# EAGLE board 12VConnector (EAGLE 9.5.2)
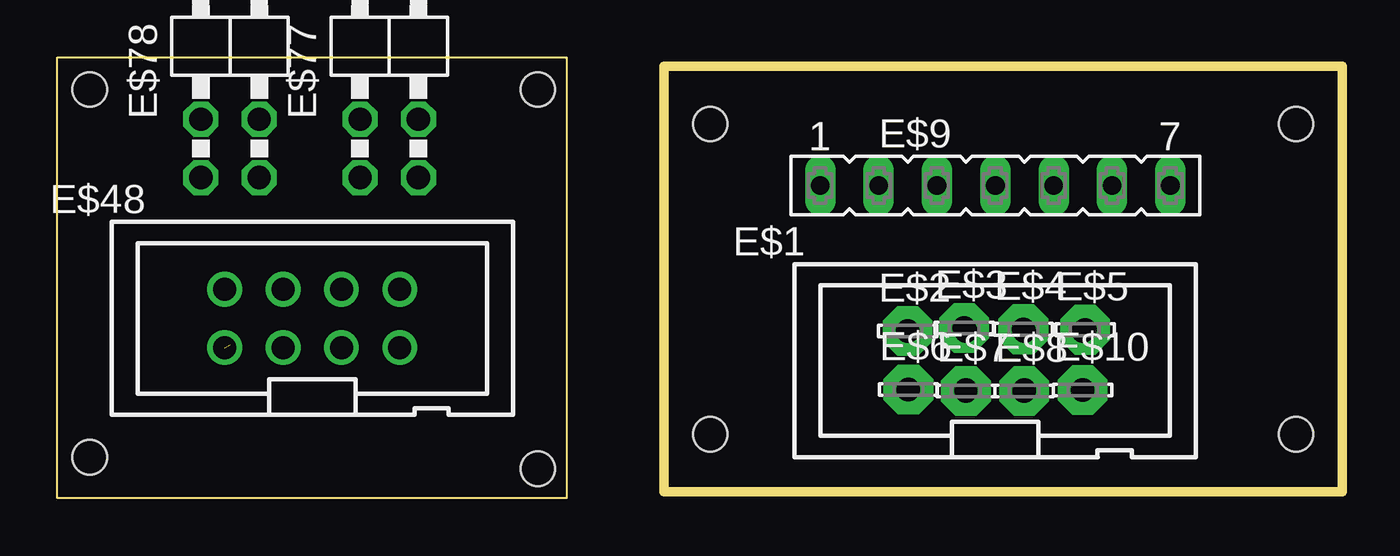
[diagram p0: board, top side]
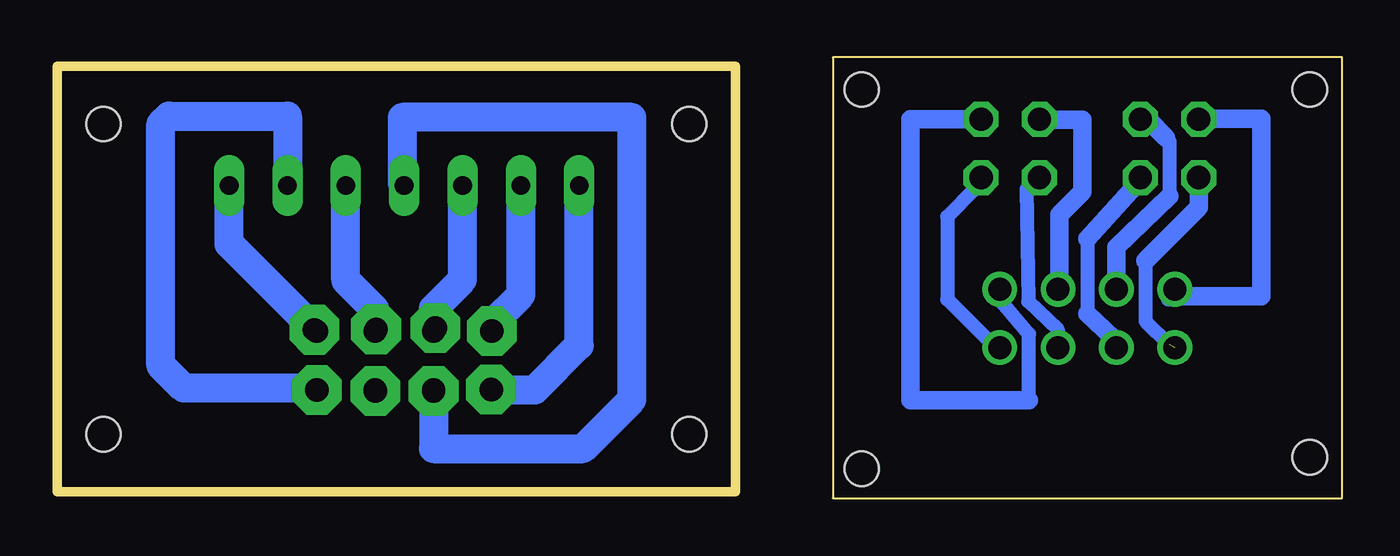
[diagram p1: board, bottom side, seen from below]

Size 55.91 x 19.17 mm. Coordinates in mm from the lower left corner, seen from the top.
Outline: 0,0 0,19.17 22.16,19.17 22.16,0 0,0
Outline: 26.41,0.28 26.41,18.78 55.91,18.78 55.91,0.28 26.41,0.28
Copper layers (1*16): Top 0.035mm / dielectric 1.5mm / Bottom 0.035mm
Design rules "default": minimum track width 10mil, minimum drill 24mil, track to track 8mil, track to pad 8mil, pad to pad 8mil, via to via 8mil, smd to smd 8mil, copper to edge 40mil, drill to drill 8mil, minimum pad ring 10mil, minimum via ring 8mil, stop-mask expansion 4mil, vias tented up to drill 0mil, thermal gap 10mil
Holes 1.5 mm at 1.41,17.78 20.91,17.78 20.91,1.28 1.41,1.78 28.41,16.28 53.91,16.28 53.91,2.78 28.41,2.78

## Footprints (pad centres in the part's own frame; a part is rotated, then mirrored left to right if it is on the bottom)
PAK100/2500-8 = drill 1 pad 1.422: 3 -2.54,-1.27; 4 -2.54,1.27; 5 0,-1.27; 6 0,1.27; 7 2.54,-1.27; 8 2.54,1.27; 9 5.08,-1.27; 10 5.08,1.27
LSP10 = drill 1.016 pad 2.159 octagon: MP 0,0
FE07 = drill 0.813 long: 1 -7.62,0; 2 -5.08,0; 3 -2.54,0; 4 0,0; 5 2.54,0; 6 5.08,0; 7 7.62,0
2X02/90 = drill 1.016 octagon: 1 -1.27,-6.35; 2 -1.27,-3.81; 3 1.27,-6.35; 4 1.27,-3.81

## Placement (x,y rotation side)
E$1  [PAK100/2500-8]  39.55,5.98 0 top
E$2  [LSP10]  36.99,7.27 0 top
E$3  [LSP10]  39.46,7.41 0 top
E$4  [LSP10]  42.04,7.35 0 top
E$5  [LSP10]  44.72,7.33 0 top
E$6  [LSP10]  37.03,4.72 0 top
E$7  [LSP10]  39.54,4.66 0 top
E$8  [LSP10]  42.07,4.65 0 top
E$9  [FE07]  40.81,13.6 0 top
E$10  [LSP10]  44.62,4.7 0 top
E$48  [PAK100/2500-8]  9.82,7.82 0 top
E$77  [2X02/90]  14.44,20.3 0 top
E$78  [2X02/90]  7.51,20.3 0 top

## Library data of the parts
E$1 E$48 = con-3m
E$2-E$8 E$10 = solpad
E$9 = con-lsta
E$77 E$78 = pinhead

## Nets
S$2: E$1.10 E$9.7
S$3: E$1.9 E$9.6
S$4: E$1.8 E$9.5
S$5: E$1.5 E$9.4
S$7: E$1.6 E$9.3
S$9: E$1.4 E$9.2
S$10: E$1.3 E$9.1
S$43: E$48.10 E$77.4
S$44: E$48.9 E$77.3
S$51: E$48.8 E$77.2
S$52: E$48.7 E$77.1
S$53: E$48.6 E$78.4
S$54: E$48.5 E$78.3
S$55: E$48.4 E$78.2
S$56: E$48.3 E$78.1

## Tracks (layer width: path | path; a pad name or v marks a point on that pad's centre or on a via)
S$2
  Bottom 1.27: E$1.10 48.44,11.06 E$9.7
S$3
  Bottom 0.61: E$1.9 44.7,4.78
  Bottom 1.27: 44.7,4.78 50.41,4.78 51.41,5.78 51.41,16.28 51.06,16.62 45.9,16.62 E$9.6
S$4
  Bottom 1.27: E$1.8 42.09,8.2 43.36,9.47 E$9.5
S$5
  Bottom 0.61: E$9.4 40.91,13.69
  Bottom 1.27: E$1.5 39.55,2.15 33.04,2.15 30.91,4.28 30.91,16.57 40.91,16.57 40.91,13.69
S$7
  Bottom 1.27: E$1.6 39.55,8.24 38.27,9.51 E$9.3
S$9
  Bottom 1.27: E$1.4 37.01,7.58 35.73,8.85 E$9.2
S$10
  Bottom 1.27: E$1.3 35.13,4.71 33.2,6.64 E$9.1
S$43
  Bottom 0.61: 13.63,4.25 13.63,7.13 14.81,8.51 E$48.10
  Bottom 0.813: 13.63,4.25 18.78,4.25 18.78,16.48 E$77.4
S$44
  Bottom 0.61: E$48.9 14.77,6.25 17.18,8.65 17.18,12.25 15.97,13.45 E$77.3
S$51
  Bottom 0.61: E$48.8 12.3,9.14 | E$77.2 13.15,16.46
  Bottom 0.813: 12.3,9.14 12.3,12.32 11.3,13.32 11.3,16.46 13.15,16.46
S$52
  Bottom 0.61: E$48.7 12.38,6.25 12.38,7.34 13.65,8.55 13.73,13.45 E$77.1
S$53
  Bottom 0.61: E$48.6 | 7.51,13.13 7.51,15.52 7.66,15.69 | E$78.4 8.46,16.48
  Bottom 0.813: E$48.6 9.81,10.91 7.51,13.13 | 8.46,16.48 7.66,15.69
S$54
  Bottom 0.61: 9.97,6.98 9.97,6.25 E$48.5 | 11.08,11.28 11.08,8.02
  Bottom 0.813: 11.08,8.02 9.97,6.98 | 11.08,11.28 8.78,13.84 E$78.3
S$55
  Bottom 0.61: 7.1,8.78 7.31,8.98 7.58,8.65 E$48.4 | E$78.2 6.21,16.51
  Bottom 0.813: 7.1,8.78 3.5,8.78 3.5,16.51 6.21,16.51
S$56  (1 unrouted)
  Bottom 0.61: 8.56,10.34 8.56,7.7 7.52,6.67
  Bottom 0.813: E$78.1 6.24,12.65 8.56,10.34

## Text on the board
bTest: Vi | V | A | M | G | R | Vi | V | A | M | Bi | B | Bi | B | G | R